# EAGLE board Pots (EAGLE 7.4.0)
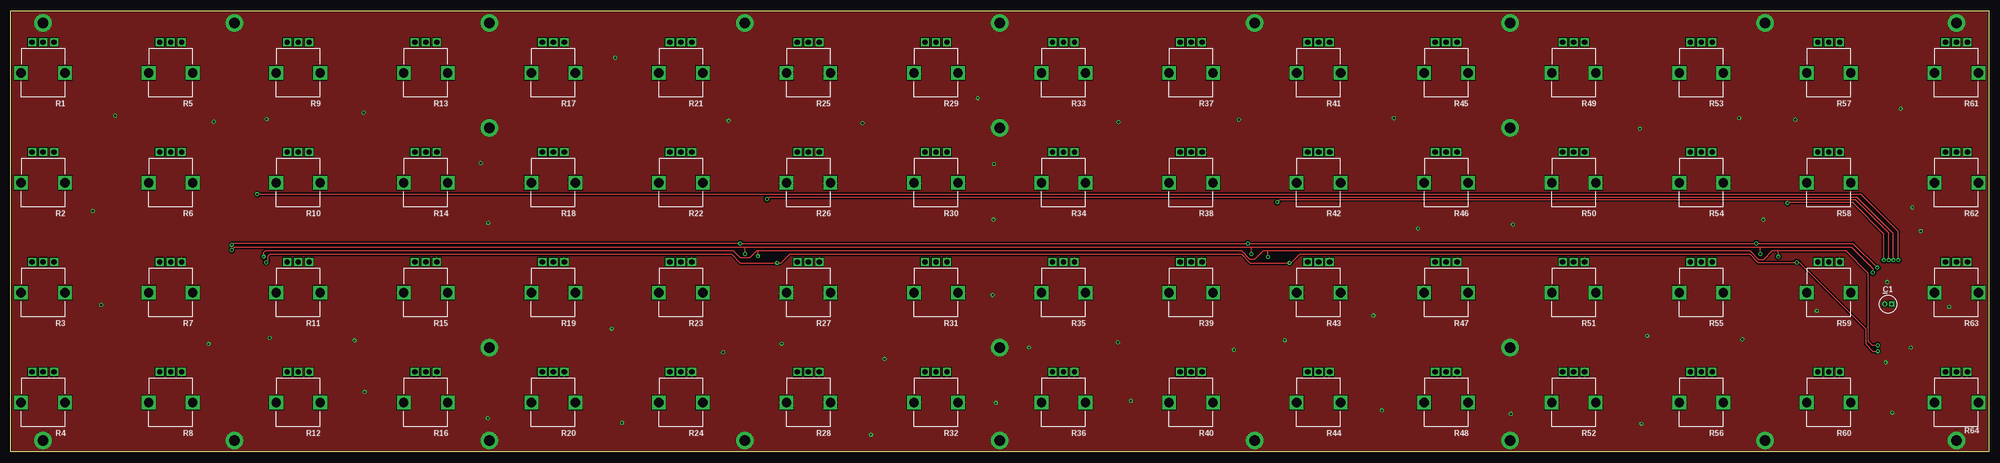
[diagram p0: board, top side]
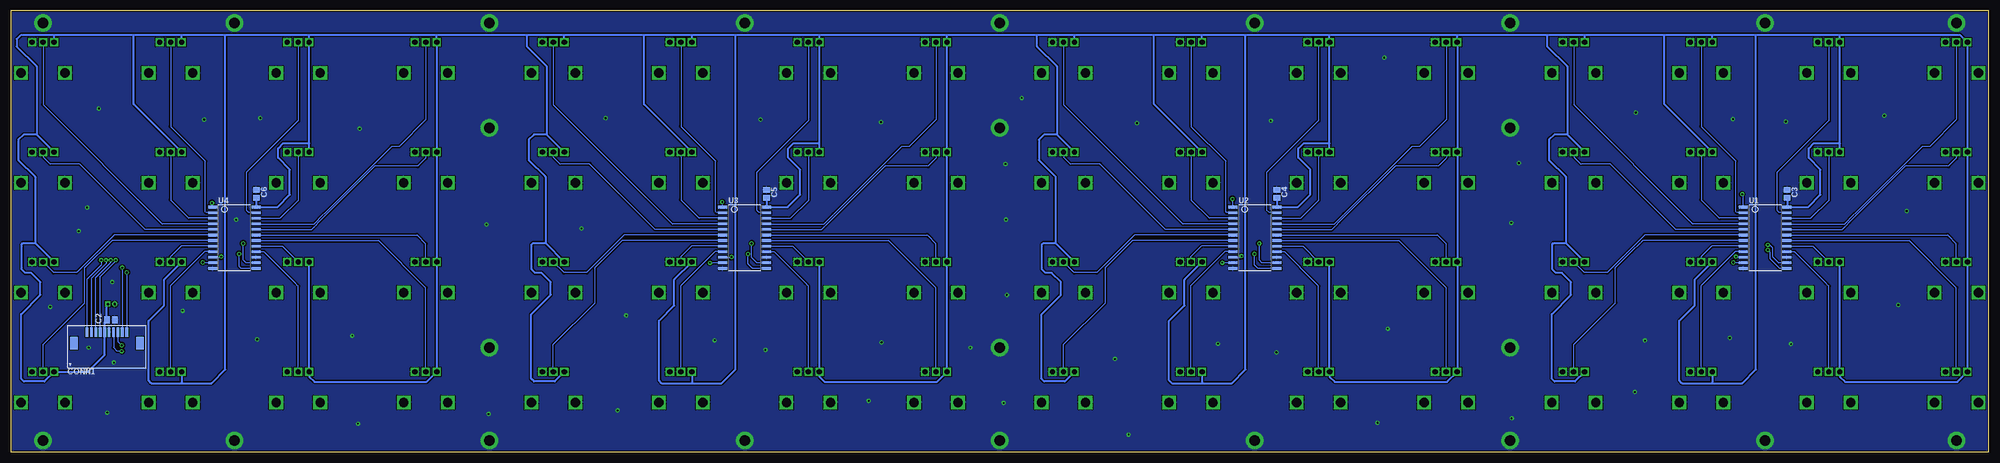
[diagram p1: board, bottom side, seen from below]

Size 449.6 x 100.3 mm. Coordinates in mm from the lower left corner, seen from the top.
Outline: 0,0 0,100.3 449.6,100.3 449.6,0 0,0
Copper layers (1*16): Top 0.035mm / dielectric 1.5mm / Bottom 0.035mm
Design rules "smiery": minimum track width 10mil, minimum drill 12mil, track to track 7mil, track to pad 5mil, pad to pad 5mil, via to via 6mil, smd to smd 0mil, copper to edge 12mil, drill to drill 10mil, minimum pad ring 13mil, minimum via ring 10mil, stop-mask expansion 2mil, vias tented up to drill 25mil, thermal gap 10mil

## Footprints (pad centres in the part's own frame; a part is rotated, then mirrored left to right if it is on the bottom)
C-TH-E-0401 = drill 0.5 square: + 0.77,0 | drill 0.5: - -0.77,0
C0805 = smd 1.27 x 1.524: 1 -0.9,0; 2 0.9,0
MOLEX-52271-1079 = smd 0.6 x 2.2: 1 -4.5,3.5; 2 -3.5,3.5; 3 -2.5,3.5; 4 -1.5,3.5; 5 -0.5,3.5; 6 0.5,3.5; 7 1.5,3.5; 8 2.5,3.5; 9 3.5,3.5; 10 4.5,3.5 | smd 1.65 x 2.8: S1 -7.5,1; S2 7.5,1
PTV09A-4025F-B103 = drill 1.2 square: 1 -2.5,-7; 2 0,-7; 3 2.5,-7 | drill 2.1 square: S1 -5,0; S2 5,0
SO24-W = smd 2.032 x 0.6: 1 -4.975,6.985; 2 -4.975,5.715; 3 -4.975,4.445; 4 -4.975,3.175; 5 -4.975,1.905; 6 -4.975,0.635; 7 -4.975,-0.635; 8 -4.975,-1.905; 9 -4.975,-3.175; 10 -4.975,-4.445; 11 -4.975,-5.715; 12 -4.975,-6.985; 13 4.975,-6.985; 14 4.975,-5.715; 15 4.975,-4.445; 16 4.975,-3.175; 17 4.975,-1.905; 18 4.975,-0.635; 19 4.975,0.635; 20 4.975,1.905; 21 4.975,3.175; 22 4.975,4.445; 23 4.975,5.715; 24 4.975,6.985

## Placement (x,y rotation side)
C1  10u  [C-TH-E-0401]  426.8,33.6 0 top
C2  100n  [C0805]  426.9,30 0 bottom
C3  100n  [C0805]  45.8,58.7 270 bottom
C4  100n  [C0805]  161.8,58.7 270 bottom
C5  100n  [C0805]  277.8,58.7 270 bottom
C6  100n  [C0805]  393.8,58.7 270 bottom
CONN1  PINHD-1X10-FFC-1MM-Z  [MOLEX-52271-1079]  427.8,23.7 0 bottom
R1  10k  [PTV09A-4025F-B103]  7.3,86.2 180 top
R2  10k  [PTV09A-4025F-B103]  7.3,61.2 180 top
R3  10k  [PTV09A-4025F-B103]  7.3,36.2 180 top
R4  10k  [PTV09A-4025F-B103]  7.3,11.2 180 top
R5  10k  [PTV09A-4025F-B103]  36.3,86.2 180 top
R6  10k  [PTV09A-4025F-B103]  36.3,61.2 180 top
R7  10k  [PTV09A-4025F-B103]  36.3,36.2 180 top
R8  10k  [PTV09A-4025F-B103]  36.3,11.2 180 top
R9  10k  [PTV09A-4025F-B103]  65.3,86.2 180 top
R10  10k  [PTV09A-4025F-B103]  65.3,61.2 180 top
R11  10k  [PTV09A-4025F-B103]  65.3,36.2 180 top
R12  10k  [PTV09A-4025F-B103]  65.3,11.2 180 top
R13  10k  [PTV09A-4025F-B103]  94.3,86.2 180 top
R14  10k  [PTV09A-4025F-B103]  94.3,61.2 180 top
R15  10k  [PTV09A-4025F-B103]  94.3,36.2 180 top
R16  10k  [PTV09A-4025F-B103]  94.3,11.2 180 top
R17  10k  [PTV09A-4025F-B103]  123.3,86.2 180 top
R18  10k  [PTV09A-4025F-B103]  123.3,61.2 180 top
R19  10k  [PTV09A-4025F-B103]  123.3,36.2 180 top
R20  10k  [PTV09A-4025F-B103]  123.3,11.2 180 top
R21  10k  [PTV09A-4025F-B103]  152.3,86.2 180 top
R22  10k  [PTV09A-4025F-B103]  152.3,61.2 180 top
R23  10k  [PTV09A-4025F-B103]  152.3,36.2 180 top
R24  10k  [PTV09A-4025F-B103]  152.3,11.2 180 top
R25  10k  [PTV09A-4025F-B103]  181.3,86.2 180 top
R26  10k  [PTV09A-4025F-B103]  181.3,61.2 180 top
R27  10k  [PTV09A-4025F-B103]  181.3,36.2 180 top
R28  10k  [PTV09A-4025F-B103]  181.3,11.2 180 top
R29  10k  [PTV09A-4025F-B103]  210.3,86.2 180 top
R30  10k  [PTV09A-4025F-B103]  210.3,61.2 180 top
R31  10k  [PTV09A-4025F-B103]  210.3,36.2 180 top
R32  10k  [PTV09A-4025F-B103]  210.3,11.2 180 top
R33  10k  [PTV09A-4025F-B103]  239.3,86.2 180 top
R34  10k  [PTV09A-4025F-B103]  239.3,61.2 180 top
R35  10k  [PTV09A-4025F-B103]  239.3,36.2 180 top
R36  10k  [PTV09A-4025F-B103]  239.3,11.2 180 top
R37  10k  [PTV09A-4025F-B103]  268.3,86.2 180 top
R38  10k  [PTV09A-4025F-B103]  268.3,61.2 180 top
R39  10k  [PTV09A-4025F-B103]  268.3,36.2 180 top
R40  10k  [PTV09A-4025F-B103]  268.3,11.2 180 top
R41  10k  [PTV09A-4025F-B103]  297.3,86.2 180 top
R42  10k  [PTV09A-4025F-B103]  297.3,61.2 180 top
R43  10k  [PTV09A-4025F-B103]  297.3,36.2 180 top
R44  10k  [PTV09A-4025F-B103]  297.3,11.2 180 top
R45  10k  [PTV09A-4025F-B103]  326.3,86.2 180 top
R46  10k  [PTV09A-4025F-B103]  326.3,61.2 180 top
R47  10k  [PTV09A-4025F-B103]  326.3,36.2 180 top
R48  10k  [PTV09A-4025F-B103]  326.3,11.2 180 top
R49  10k  [PTV09A-4025F-B103]  355.3,86.2 180 top
R50  10k  [PTV09A-4025F-B103]  355.3,61.2 180 top
R51  10k  [PTV09A-4025F-B103]  355.3,36.2 180 top
R52  10k  [PTV09A-4025F-B103]  355.3,11.2 180 top
R53  10k  [PTV09A-4025F-B103]  384.3,86.2 180 top
R54  10k  [PTV09A-4025F-B103]  384.3,61.2 180 top
R55  10k  [PTV09A-4025F-B103]  384.3,36.2 180 top
R56  10k  [PTV09A-4025F-B103]  384.3,11.2 180 top
R57  10k  [PTV09A-4025F-B103]  413.3,86.2 180 top
R58  10k  [PTV09A-4025F-B103]  413.3,61.2 180 top
R59  10k  [PTV09A-4025F-B103]  413.3,36.2 180 top
R60  10k  [PTV09A-4025F-B103]  413.3,11.2 180 top
R61  10k  [PTV09A-4025F-B103]  442.3,86.2 180 top
R62  10k  [PTV09A-4025F-B103]  442.3,61.2 180 top
R63  10k  [PTV09A-4025F-B103]  442.3,36.2 180 top
R64  10k  [PTV09A-4025F-B103]  442.3,11.2 180 top
U1  MC14067BDWR2G-SO24W  [SO24-W]  50.8,48.7 0 bottom
U2  MC14067BDWR2G-SO24W  [SO24-W]  166.8,48.7 0 bottom
U3  MC14067BDWR2G-SO24W  [SO24-W]  282.8,48.7 0 bottom
U4  MC14067BDWR2G-SO24W  [SO24-W]  398.8,48.7 0 bottom

## Library data of the parts
C1-C6 R1-R64 = igor_lbr
CONN1 = igor_lbr; MANUFACTURER: Molex; MPN: 52271-1079
U1-U4 = igor_lbr; MANUFACTURER: ON Semiconductor; MPN: MC14067BDWR2G

## Nets
+3V3: C1.+ C2.1 C3.2 C4.2 C5.2 C6.2 CONN1.5 R1.3 R2.3 R3.3 R4.3 R5.3 R6.3 R7.3 R8.3 R9.3 R10.3 R11.3 R12.3 R13.3 R14.3 R15.3 R16.3 R17.3 R18.3 R19.3 R20.3 R21.3 R22.3 R23.3 R24.3 R25.3 R26.3 R27.3 R28.3 R29.3 R30.3 R31.3 R32.3 R33.3 R34.3 R35.3 R36.3 R37.3 R38.3 R39.3 R40.3 R41.3 R42.3 R43.3 R44.3 R45.3 R46.3 R47.3 R48.3 R49.3 R50.3 R51.3 R52.3 R53.3 R54.3 R55.3 R56.3 R57.3 R58.3 R59.3 R60.3 R61.3 R62.3 R63.3 R64.3 U1.24 U2.24 U3.24 U4.24
GND: C1.- C2.2 C3.1 C4.1 C5.1 C6.1 CONN1.6 R1.1 R1.S1 R1.S2 R2.1 R2.S1 R2.S2 R3.1 R3.S1 R3.S2 R4.1 R4.S1 R4.S2 R5.1 R5.S1 R5.S2 R6.1 R6.S1 R6.S2 R7.1 R7.S1 R7.S2 R8.1 R8.S1 R8.S2 R9.1 R9.S1 R9.S2 R10.1 R10.S1 R10.S2 R11.1 R11.S1 R11.S2 R12.1 R12.S1 R12.S2 R13.1 R13.S1 R13.S2 R14.1 R14.S1 R14.S2 R15.1 R15.S1 R15.S2 R16.1 R16.S1 R16.S2 R17.1 R17.S1 R17.S2 R18.1 R18.S1 R18.S2 R19.1 R19.S1 R19.S2 R20.1 R20.S1 R20.S2 R21.1 R21.S1 R21.S2 R22.1 R22.S1 R22.S2 R23.1 R23.S1 R23.S2 R24.1 R24.S1 R24.S2 R25.1 R25.S1 R25.S2 R26.1 R26.S1 R26.S2 R27.1 R27.S1 R27.S2 R28.1 R28.S1 R28.S2 R29.1 R29.S1 R29.S2 R30.1 R30.S1 R30.S2 R31.1 R31.S1 R31.S2 R32.1 R32.S1 R32.S2 R33.1 R33.S1 R33.S2 R34.1 R34.S1 R34.S2 R35.1 R35.S1 R35.S2 R36.1 R36.S1 R36.S2 R37.1 R37.S1 R37.S2 R38.1 R38.S1 R38.S2 R39.1 R39.S1 R39.S2 R40.1 R40.S1 R40.S2 R41.1 R41.S1 R41.S2 R42.1 R42.S1 R42.S2 R43.1 R43.S1 R43.S2 R44.1 R44.S1 R44.S2 R45.1 R45.S1 R45.S2 R46.1 R46.S1 R46.S2 R47.1 R47.S1 R47.S2 R48.1 R48.S1 R48.S2 R49.1 R49.S1 R49.S2 R50.1 R50.S1 R50.S2 R51.1 R51.S1 R51.S2 R52.1 R52.S1 R52.S2 R53.1 R53.S1 R53.S2 R54.1 R54.S1 R54.S2 R55.1 R55.S1 R55.S2 R56.1 R56.S1 R56.S2 R57.1 R57.S1 R57.S2 R58.1 R58.S1 R58.S2 R59.1 R59.S1 R59.S2 R60.1 R60.S1 R60.S2 R61.1 R61.S1 R61.S2 R62.1 R62.S1 R62.S2 R63.1 R63.S1 R63.S2 R64.1 R64.S1 R64.S2 U1.12 U1.15 U2.12 U2.15 U3.12 U3.15 U4.12 U4.15
MUX_COMMON_1: CONN1.1 U1.1
MUX_COMMON_2: CONN1.2 U2.1
MUX_COMMON_3: CONN1.3 U3.1
MUX_COMMON_4: CONN1.4 U4.1
MUX_S0: CONN1.8 U1.10 U2.10 U3.10 U4.10
MUX_S1: CONN1.7 U1.11 U2.11 U3.11 U4.11
MUX_S2: CONN1.9 U1.14 U2.14 U3.14 U4.14
MUX_S3: CONN1.10 U1.13 U2.13 U3.13 U4.13
POT1: R1.2 U1.21
POT2: R2.2 U1.20
POT3: R3.2 U1.19
POT4: R4.2 U1.18
POT5: R5.2 U1.23
POT6: R6.2 U1.22
POT7: R7.2 U1.17
POT8: R8.2 U1.16
POT9: R9.2 U1.2
POT10: R10.2 U1.3
POT11: R11.2 U1.8
POT12: R12.2 U1.9
POT13: R13.2 U1.4
POT14: R14.2 U1.5
POT15: R15.2 U1.6
POT16: R16.2 U1.7
POT17: R17.2 U2.21
POT18: R18.2 U2.20
POT19: R19.2 U2.19
POT20: R20.2 U2.18
POT21: R21.2 U2.23
POT22: R22.2 U2.22
POT23: R23.2 U2.17
POT24: R24.2 U2.16
POT25: R25.2 U2.2
POT26: R26.2 U2.3
POT27: R27.2 U2.8
POT28: R28.2 U2.9
POT29: R29.2 U2.4
POT30: R30.2 U2.5
POT31: R31.2 U2.6
POT32: R32.2 U2.7
POT33: R33.2 U3.21
POT34: R34.2 U3.20
POT35: R35.2 U3.19
POT36: R36.2 U3.18
POT37: R37.2 U3.23
POT38: R38.2 U3.22
POT39: R39.2 U3.17
POT40: R40.2 U3.16
POT41: R41.2 U3.2
POT42: R42.2 U3.3
POT43: R43.2 U3.8
POT44: R44.2 U3.9
POT45: R45.2 U3.4
POT46: R46.2 U3.5
POT47: R47.2 U3.6
POT48: R48.2 U3.7
POT49: R49.2 U4.21
POT50: R50.2 U4.20
POT51: R51.2 U4.19
POT52: R52.2 U4.18
POT53: R53.2 U4.23
POT54: R54.2 U4.22
POT55: R55.2 U4.17
POT56: R56.2 U4.16
POT57: R57.2 U4.2
POT58: R58.2 U4.3
POT59: R59.2 U4.8
POT60: R60.2 U4.9
POT61: R61.2 U4.4
POT62: R62.2 U4.5
POT63: R63.2 U4.6
POT64: R64.2 U4.7

## Tracks (layer width: path | path; a pad name or v marks a point on that pad's centre or on a via)
+3V3
  Bottom 0.406: R32.3 210,16 214.7,16 215.3,16.6 215.3,31.3 210.9,35.7 210.9,38.6 213,40.7 214.4,40.7 215.2,41.5 215.2,47.2 214.9,47.5 212.1,47.5 | 212.1,47.5 R31.3 | 212.1,47.5 212.1,62.6 215.9,66.4 215.9,71 214.7,72.2 211.8,72.2 | C4.2 161.8,55.71 U2.24 157.01,55.69 154.2,58.5 154.2,64.2 156.9,66.9 156.9,69 155.7,70.2 149.8,70.2 | R30.3 211.8,72.2 | 211.8,72.2 211.8,87.7 216.3,92.2 216.3,94.9 | R27.3 182.8,39.2 182.8,33.3 186.3,29.8 186.3,16.2 185.7,15.6 178.9,15.6 | R28.3 178.8,15.7 178.9,15.6 | R26.3 189.7,79.1 189.7,94.9 | 178.9,15.6 172,15.6 168.9,18.7 168.9,94.9 | R23.3 R24.3 149.8,17.1 148.6,15.9 123.1,15.9 R20.3 R19.3 R18.3 R17.3 120.8,94.9 | R16.3 94,16 98.7,16 99.3,16.6 99.3,31.3 94.9,35.7 94.9,38.6 97,40.7 98.4,40.7 99.2,41.5 99.2,47.2 98.9,47.5 96.1,47.5 | 96.1,47.5 R15.3 | 96.1,47.5 96.1,62.6 99.9,66.4 99.9,71 98.7,72.2 95.8,72.2 | C3.2 45.8,55.71 U1.24 41.02,55.69 38.2,58.5 38.2,64.2 40.9,66.9 40.9,69 39.7,70.2 33.8,70.2 | R14.3 95.8,72.2 | 95.8,72.2 95.8,87.7 100.3,92.2 100.3,94.8 100.2,94.9 | R11.3 66.8,39.2 66.8,33.3 70.3,29.8 70.3,16.2 69.7,15.6 62.9,15.6 | R12.3 62.8,15.7 62.9,15.6 | R10.3 73.7,79.1 73.7,94.9 | 62.9,15.6 56,15.6 52.9,18.7 52.9,94.9 | R7.3 R8.3 33.8,17.1 32.6,15.9 7.1,15.9 R4.3 R3.3 R2.3 R1.3 6.5,94.9 33.8,94.9 | R48.3 326,16 330.7,16 331.3,16.6 331.3,31.3 326.9,35.7 326.9,38.6 329,40.7 330.4,40.7 331.2,41.5 331.2,47.2 330.9,47.5 328.1,47.5 | 328.1,47.5 R47.3 | 328.1,47.5 328.1,62.6 331.9,66.4 331.9,71 330.7,72.2 327.8,72.2 | C5.2 277.8,55.71 U3.24 273.01,55.69 270.2,58.5 270.2,64.2 272.9,66.9 272.9,69 271.7,70.2 265.8,70.2 | R46.3 327.8,72.2
  Bottom 0.406: 327.8,72.2 327.8,87.7 332.3,92.2 332.3,94.9 | R43.3 298.8,39.2 298.8,33.3 302.3,29.8 302.3,16.2 301.7,15.6 294.9,15.6 | R44.3 294.8,15.7 294.9,15.6 | R42.3 305.7,79.1 305.7,94.9 | 294.9,15.6 288,15.6 284.9,18.7 284.9,94.9 | R39.3 R40.3 265.8,17.1 264.6,15.9 239.1,15.9 R36.3 R35.3 R34.3 R33.3 236.8,94.8 236.7,94.9 | 444.1,47.5 R63.3 | 444.1,47.5 446.9,47.5 447.2,47.2 447.2,41.5 446.4,40.7 445,40.7 442.9,38.6 442.9,35.7 447.3,31.3 447.3,16.6 446.7,16 442,16 R64.3 432.1,18.2 428.3,22 CONN1.5 428.3,29.5 C2.1 427.8,33.37 C1.+ | 444.1,47.5 444.1,62.6 447.9,66.4 447.9,71 446.7,72.2 443.8,72.2 | C6.2 393.8,55.71 U4.24 389.01,55.69 386.2,58.5 386.2,64.2 388.9,66.9 388.9,69 387.7,70.2 381.8,70.2 | R62.3 443.8,72.2 | 443.8,72.2 443.8,87.7 448.3,92.2 448.3,93.9 447.3,94.9 439.8,94.9 | R59.3 414.8,39.2 414.8,33.3 418.3,29.8 418.3,16.2 417.7,15.6 410.9,15.6 | R60.3 410.8,15.7 410.9,15.6 | R58.3 421.7,79.1 421.7,94.9 | 410.9,15.6 404,15.6 400.9,18.7 400.9,94.9 | R55.3 R56.3 381.8,17.1 380.6,15.9 355.1,15.9 R52.3 R51.3 R50.3 R49.3 352.8,94.9 | 439.8,94.9 421.7,94.9 | 421.7,94.9 410.8,94.9 | 410.8,94.9 400.9,94.9 | 400.9,94.9 381.8,94.9 | 381.8,94.9 352.8,94.9 | 352.8,94.9 332.3,94.9 | 332.3,94.9 323.8,94.9 | 323.8,94.9 305.7,94.9 | 305.7,94.9 294.8,94.9 | 294.8,94.9 284.9,94.9 | 284.9,94.9 265.8,94.9 | 265.8,94.9 236.7,94.9 | 236.7,94.9 216.3,94.9 | 216.3,94.9 207.8,94.9 | 207.8,94.9 189.7,94.9 | 189.7,94.9 178.8,94.9 | 178.8,94.9 168.9,94.9 | 168.9,94.9 149.8,94.9 | 149.8,94.9 120.8,94.9 | 120.8,94.9 100.2,94.9 | 100.2,94.9 91.8,94.9 | 91.8,94.9 73.7,94.9 | 73.7,94.9 62.8,94.9 | 62.8,94.9 52.9,94.9 | 52.9,94.9 33.8,94.9
  Bottom 0.406: R57.3 410.8,94.9 | R45.3 323.8,94.9 | R41.3 294.8,94.9 | R29.3 207.8,94.9 | R25.3 178.8,94.9 | R13.3 91.8,94.9 | R9.3 62.8,94.9 | R61.3 439.8,94.9 | 381.8,94.9 R53.3 381.8,70.2 | R54.3 381.8,70.2 | 265.8,94.9 R37.3 265.8,70.2 | R38.3 265.8,70.2 | R22.3 149.8,70.2 | 149.8,70.2 R21.3 149.8,94.9 | R6.3 33.8,70.2 | 33.8,70.2 R5.3 33.8,94.9
GND  (via drill 0.4 pad 0.6, 2.4 pad 4)
  other vias: 7.3,2.6 50.8,2.6 108.8,2.6 166.8,2.6 224.8,2.6 282.8,2.6 340.8,2.6 398.8,2.6 442.3,2.6 7.3,97.6 50.8,97.6 108.8,97.6 166.8,97.6 224.8,97.6 282.8,97.6 340.8,97.6 398.8,97.6 442.3,97.6 108.8,73.7 108.8,23.7 224.8,73.7 224.8,23.7 340.8,73.7 340.8,23.7 18.6,54.8 20.5,33.4 44.9,24.5 58.8,25.9 23.7,76.5 46.1,75.1 58.1,75.7 80.2,77.2 106.8,65.7 108.5,52.1 78.1,25.3 80.4,13.6 108.4,7.6 138.9,6.6 136.6,28 161.9,22.6 175.2,24.6 198.6,21.1 193.6,74.8 163.2,75.3 137.4,89.7 219.8,80.5 223.5,65.5 223.4,52.8 223.2,35.7 231.5,23.7 223.9,11.1 251.7,24.9 254.6,11.6 278.1,23.2 289.6,25.4 279.2,75.6 251.8,75 314.4,75.9 319.9,50.8 309.7,31 311.7,9.4 341,8.6 372,26.4 370.7,6.4 393.6,25.6 427.7,8.9 434.2,50.2 429.6,78.1 405.7,75.6 392.9,75.9 370.3,73.5 341.5,51.7 410.6,32.1 426.6,38.6 440.7,33 432.3,55.6 195.5,3.9 398.4,52.8 431.9,23.7 426.2,20.3
  pour Top (isolate 0.305): 0,100.3 449.6,100.3 449.6,0 0,0
  pour Bottom (isolate 0.305): 0,100.3 449.6,100.3 449.6,0 0,0
MUX_COMMON_1  (via drill 0.4 pad 0.6)
  Top 0.254: v56,58.6 420.6,58.6 429.1,50.1 v429.1,43.6
  Bottom 0.254: U1.1 55.77,58.38 v56,58.6 | CONN1.1 432.3,39.3 429.1,42.5 v429.1,43.6
MUX_COMMON_2  (via drill 0.4 pad 0.6)
  Top 0.254: v171.9,57.5 172.4,58 419.7,58 428,49.7 v428,43.6
  Bottom 0.254: U2.1 171.78,57.38 v171.9,57.5 | CONN1.2 431.3,39.5 428,42.8 v428,43.6
MUX_COMMON_3  (via drill 0.4 pad 0.6)
  Top 0.254: v287.9,56.8 288.5,57.4 419.3,57.4 426.9,49.8 v426.9,43.6
  Bottom 0.254: U3.1 287.77,56.67 v287.9,56.8 | CONN1.3 430.3,39.7 426.9,43.1 v426.9,43.6
MUX_COMMON_4  (via drill 0.4 pad 0.6)
  Top 0.254: v403.9,56.6 404.1,56.8 418.6,56.8 425.8,49.6 v425.8,43.6
  Bottom 0.254: U4.1 403.77,56.48 v403.9,56.6 | CONN1.4 429.3,39.9 425.8,43.4 v425.8,43.6
MUX_S0  (via drill 0.4 pad 0.6)
  Top 0.254: v57.4,44.4 57.4,45.3 57.9,45.8 164.2,45.8 165.8,44.2 168,44.2 169.6,45.8 169.8,45.8 | 285.8,45.8 284.7,45.8 282.8,43.9 281.6,43.9 279.7,45.8 169.8,45.8 | 285.8,45.8 395.3,45.8 397.3,43.8 398.5,43.8 400.5,45.8 401.7,45.8 | 401.7,45.8 417.1,45.8 422.2,40.7 422.2,25.2 423.2,24.2 v424.4,24.2 | v401.8,44.4 401.8,45.7 401.7,45.8 | v285.8,44.3 285.8,45.8 | v169.8,44.5 169.8,45.8
  Bottom 0.254: U1.10 57.26,44.26 v57.4,44.4 | CONN1.8 425.3,25.1 v424.4,24.2 | U4.10 401.94,44.26 v401.8,44.4 | U3.10 285.85,44.26 v285.8,44.3 | U2.10 170.04,44.26 v169.8,44.5
MUX_S1  (via drill 0.4 pad 0.6)
  Top 0.254: v58,43.1 58.5,43.6 58.5,44.6 58.9,45 163.8,45 165.8,43 v174.2,43 175.1,43 177.1,45 279.7,45 281.7,43 v290.7,43 291,43 293,45 395.3,45 397.2,43.1 v406,43.1 406.6,43.1 421.7,28 421.7,24.5 423.3,22.9 v424.4,22.9
  Bottom 0.254: U1.11 57.88,42.98 v58,43.1 | v424.4,22.9 425.5,22.9 426.3,23.7 CONN1.7 | U4.11 405.88,42.98 v406,43.1 | U3.11 290.69,42.98 v290.7,43 | U2.11 174.19,42.98 v174.2,43
MUX_S2  (via drill 0.4 pad 0.6)
  Top 0.254: v424.3,41.9 418.8,47.4 v396.8,47.4 v281.2,47.4 v165.8,47.4 50.5,47.4 v50.2,47.1
  Bottom 0.254: v424.3,41.9 CONN1.9 | v50.2,47.1 49.7,47.1 49.1,46.5 49.1,44.4 47.69,42.98 U1.14 | U2.14 165.19,42.98 165.8,43.6 v165.8,47.4 | U3.14 279.99,42.98 281.2,44.2 v281.2,47.4 | U4.14 396.08,42.98 396.8,43.7 v396.8,47.4
MUX_S3  (via drill 0.4 pad 0.6)
  Top 0.254: v50.2,45.9 50.9,46.6 166.9,46.6 | 166.9,46.6 281.9,46.6 | 281.9,46.6 397.7,46.6 | 397.7,46.6 418.4,46.6 423.3,41.7 v423.3,40.8 | v166.9,45 166.9,46.6 | v282,45 282,46.5 281.9,46.6 | v397.7,45 397.7,46.6
  Bottom 0.254: U1.13 47.41,41.72 49.6,43.9 49.6,45.3 v50.2,45.9 | v423.3,40.8 CONN1.10 | U2.13 166.12,41.72 166.9,42.5 v166.9,45 | U3.13 281.01,41.72 282,42.7 v282,45 | U4.13 397.21,41.72 397.7,42.2 v397.7,45
POT1
  Bottom 0.254: R1.2 7.3,75.6 13.4,69.5 15.1,69.5 30.45,54.15 30.6,54 32.73,51.88 U1.21
POT2
  Bottom 0.254: R2.2 7.3,66.8 9.1,65 18.9,65 31.65,52.25 32.5,51.4 33.3,50.6 U1.20
POT3
  Bottom 0.254: R3.2 7.3,47.3 9.05,49.05 9.3,49.3 9.34,49.34 U1.19
POT4
  Bottom 0.254: R4.2 7.3,37.3 18.07,48.06 U1.18
POT5
  Bottom 0.254: R5.2 36.3,75.3 48,63.6 48,54.9 47.52,54.41 U1.23
POT6
  Bottom 0.254: R6.2 36.3,57.2 40.35,53.15 U1.22
POT7
  Bottom 0.254: U1.17 39.9,46.8 R7.2
POT8
  Bottom 0.254: U1.16 44.12,45.52 37,38.4 36.6,38 36.3,37.7 R8.2
POT9
  Bottom 0.254: R9.2 65.3,74 57.4,66.1 57.4,54.6 57.22,54.41 U1.2
POT10
  Bottom 0.254: R10.2 65.3,57.3 61.15,53.15 U1.3
POT11
  Bottom 0.254: R11.2 65.3,44.4 62.9,46.8 U1.8
POT12
  Bottom 0.254: R12.2 65.3,37.8 57.58,45.52 U1.9
POT13
  Bottom 0.254: R13.2 94.3,79 67.17,51.88 U1.4
POT14
  Bottom 0.254: U1.5 71.11,50.6 86,65.5 92.7,65.5 94.3,67.1 R14.2
POT15
  Bottom 0.254: U1.6 78.17,49.34 86.7,40.8 91.9,40.8 R15.2
POT16
  Bottom 0.254: R16.2 94.3,24.4 84.8,33.9 84.8,41.9 81.15,45.55 79.1,47.6 78.64,48.06 U1.7
POT17
  Bottom 0.254: R17.2 123.3,75.6 129.4,69.5 131.1,69.5 146.45,54.15 146.6,54 148.72,51.88 U2.21
POT18
  Bottom 0.254: R18.2 123.3,66.8 125.1,65 134.9,65 147.65,52.25 148.5,51.4 149.29,50.6 U2.20
POT19
  Bottom 0.254: R19.2 123.3,47.3 125.05,49.05 125.3,49.3 125.33,49.34 U2.19
POT20
  Bottom 0.254: R20.2 123.3,37.3 134.06,48.06 U2.18
POT21
  Bottom 0.254: R21.2 152.3,75.3 164,63.6 164,54.9 163.51,54.41 U2.23
POT22
  Bottom 0.254: R22.2 152.3,57.2 156.35,53.15 U2.22
POT23
  Bottom 0.254: U2.17 155.9,46.8 R23.2
POT24
  Bottom 0.254: U2.16 160.12,45.52 153,38.4 152.6,38 152.3,37.7 R24.2
POT25
  Bottom 0.254: R25.2 181.3,74 173.4,66.1 173.4,54.6 173.22,54.41 U2.2
POT26
  Bottom 0.254: R26.2 181.3,57.3 177.15,53.15 U2.3
POT27
  Bottom 0.254: R27.2 181.3,44.4 178.9,46.8 U2.8
POT28
  Bottom 0.254: R28.2 181.3,37.8 173.57,45.52 U2.9
POT29
  Bottom 0.254: R29.2 210.3,79 183.18,51.88 U2.4
POT30
  Bottom 0.254: U2.5 187.1,50.6 202,65.5 208.7,65.5 210.3,67.1 R30.2
POT31
  Bottom 0.254: U2.6 194.16,49.34 202.7,40.8 207.9,40.8 R31.2
POT32
  Bottom 0.254: R32.2 210.3,24.4 200.8,33.9 200.8,41.9 194.63,48.06 U2.7
POT33
  Bottom 0.254: R33.2 239.3,75.6 245.4,69.5 247.1,69.5 262.45,54.15 262.6,54 264.73,51.88 U3.21
POT34
  Bottom 0.254: R34.2 239.3,66.8 241.1,65 250.9,65 263.65,52.25 264.5,51.4 265.3,50.6 U3.20
POT35
  Bottom 0.254: R35.2 239.3,47.3 241.05,49.05 241.3,49.3 241.34,49.34 U3.19
POT36
  Bottom 0.254: R36.2 239.3,37.3 250.06,48.06 U3.18
POT37
  Bottom 0.254: R37.2 268.3,75.3 280,63.6 280,54.9 279.51,54.41 U3.23
POT38
  Bottom 0.254: R38.2 268.3,57.2 272.36,53.15 U3.22
POT39
  Bottom 0.254: U3.17 271.89,46.8 R39.2
POT40
  Bottom 0.254: U3.16 276.12,45.52 269,38.4 268.6,38 268.3,37.7 R40.2
POT41
  Bottom 0.254: R41.2 297.3,74 289.4,66.1 289.4,54.6 289.21,54.41 U3.2
POT42
  Bottom 0.254: R42.2 297.3,57.3 293.14,53.15 U3.3
POT43
  Bottom 0.254: R43.2 297.3,44.4 294.9,46.8 294.89,46.8 U3.8
POT44
  Bottom 0.254: R44.2 297.3,37.8 289.57,45.52 U3.9
POT45
  Bottom 0.254: R45.2 326.3,79 299.18,51.88 U3.4
POT46
  Bottom 0.254: U3.5 303.11,50.6 318,65.5 324.7,65.5 326.3,67.1 R46.2
POT47
  Bottom 0.254: U3.6 310.17,49.34 318.7,40.8 323.9,40.8 R47.2
POT48
  Bottom 0.254: R48.2 326.3,24.4 316.8,33.9 316.8,41.9 310.63,48.06 U3.7
POT49
  Bottom 0.254: R49.2 355.3,75.6 361.4,69.5 363.1,69.5 378.45,54.15 378.6,54 380.73,51.88 U4.21
POT50
  Bottom 0.254: R50.2 355.3,66.8 357.1,65 366.9,65 379.65,52.25 380.5,51.4 381.3,50.6 U4.20
POT51
  Bottom 0.254: R51.2 355.3,47.3 357.05,49.05 357.3,49.3 357.33,49.34 U4.19
POT52
  Bottom 0.254: R52.2 355.3,37.3 366.06,48.06 U4.18
POT53
  Bottom 0.254: R53.2 384.3,75.3 396,63.6 396,54.9 395.51,54.41 U4.23
POT54
  Bottom 0.254: R54.2 384.3,57.2 388.36,53.15 U4.22
POT55
  Bottom 0.254: U4.17 387.89,46.8 R55.2
POT56
  Bottom 0.254: U4.16 392.12,45.52 385,38.4 384.6,38 384.3,37.7 R56.2
POT57
  Bottom 0.254: R57.2 413.3,74 405.4,66.1 405.4,54.6 405.21,54.41 U4.2
POT58
  Bottom 0.254: R58.2 413.3,57.3 409.14,53.15 U4.3
POT59
  Bottom 0.254: R59.2 413.3,44.4 410.9,46.8 410.89,46.8 U4.8
POT60
  Bottom 0.254: U4.9 405.57,45.52 413.3,37.8 R60.2
POT61
  Bottom 0.254: R61.2 442.3,79 415.18,51.88 U4.4
POT62
  Bottom 0.254: U4.5 419.11,50.6 434,65.5 440.7,65.5 442.3,67.1 R62.2
POT63
  Bottom 0.254: U4.6 426.17,49.34 434.7,40.8 439.9,40.8 R63.2
POT64
  Bottom 0.254: R64.2 442.3,24.4 432.8,33.9 432.8,41.9 426.63,48.06 U4.7